# Altium PCB tarjeta v1.1.PcbDoc
Units mil, origin at the board's own origin, x right, y up, seen from the top; angles counter-clockwise.
Board outline 3450 x 3100 mil, 2 copper layers (Top Layer, Bottom Layer); 39 components, 28 nets, 119 pads, 0 vias.
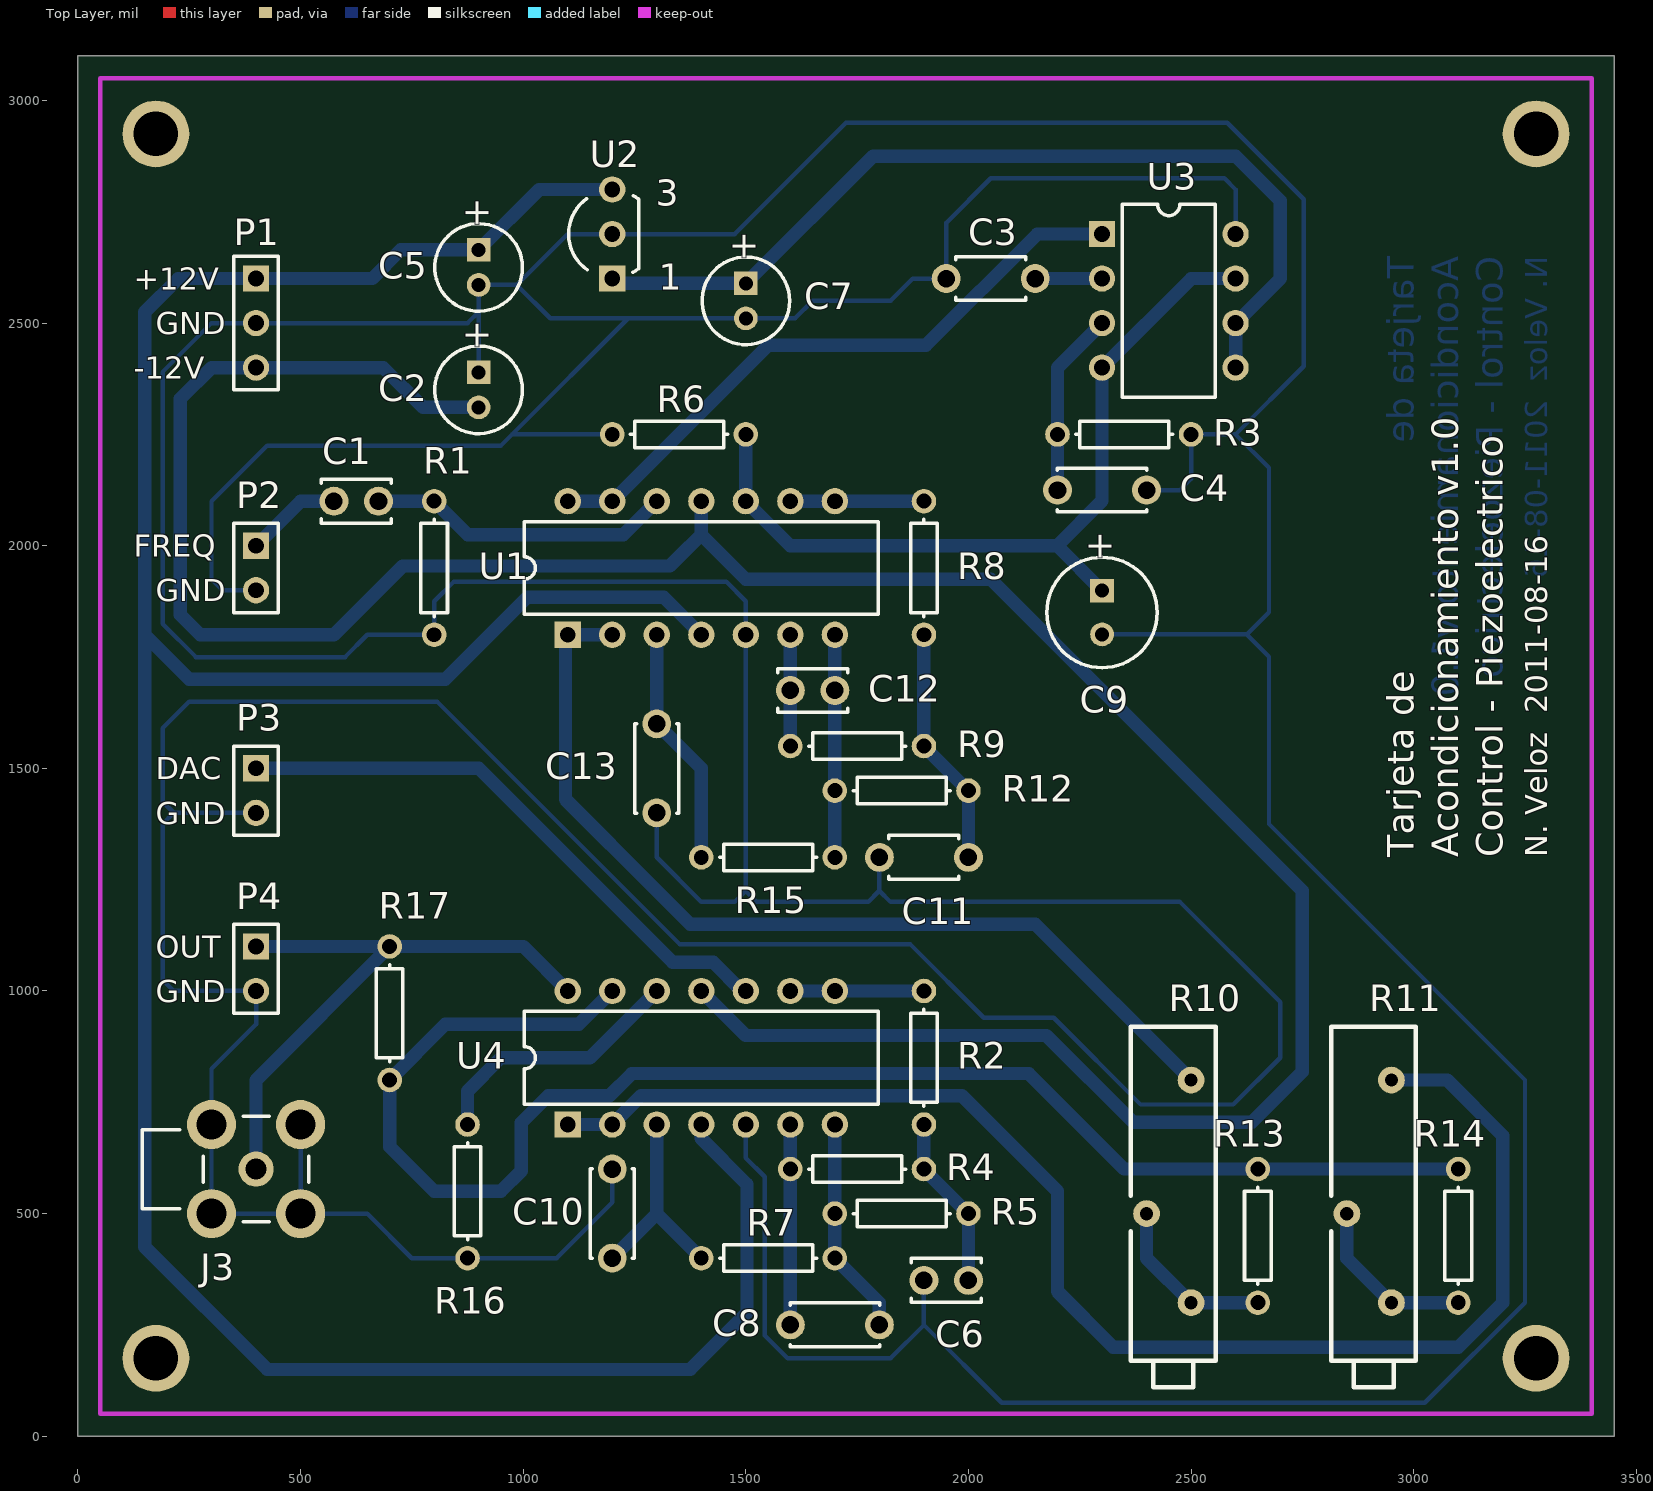
[diagram p0: Top Layer view]
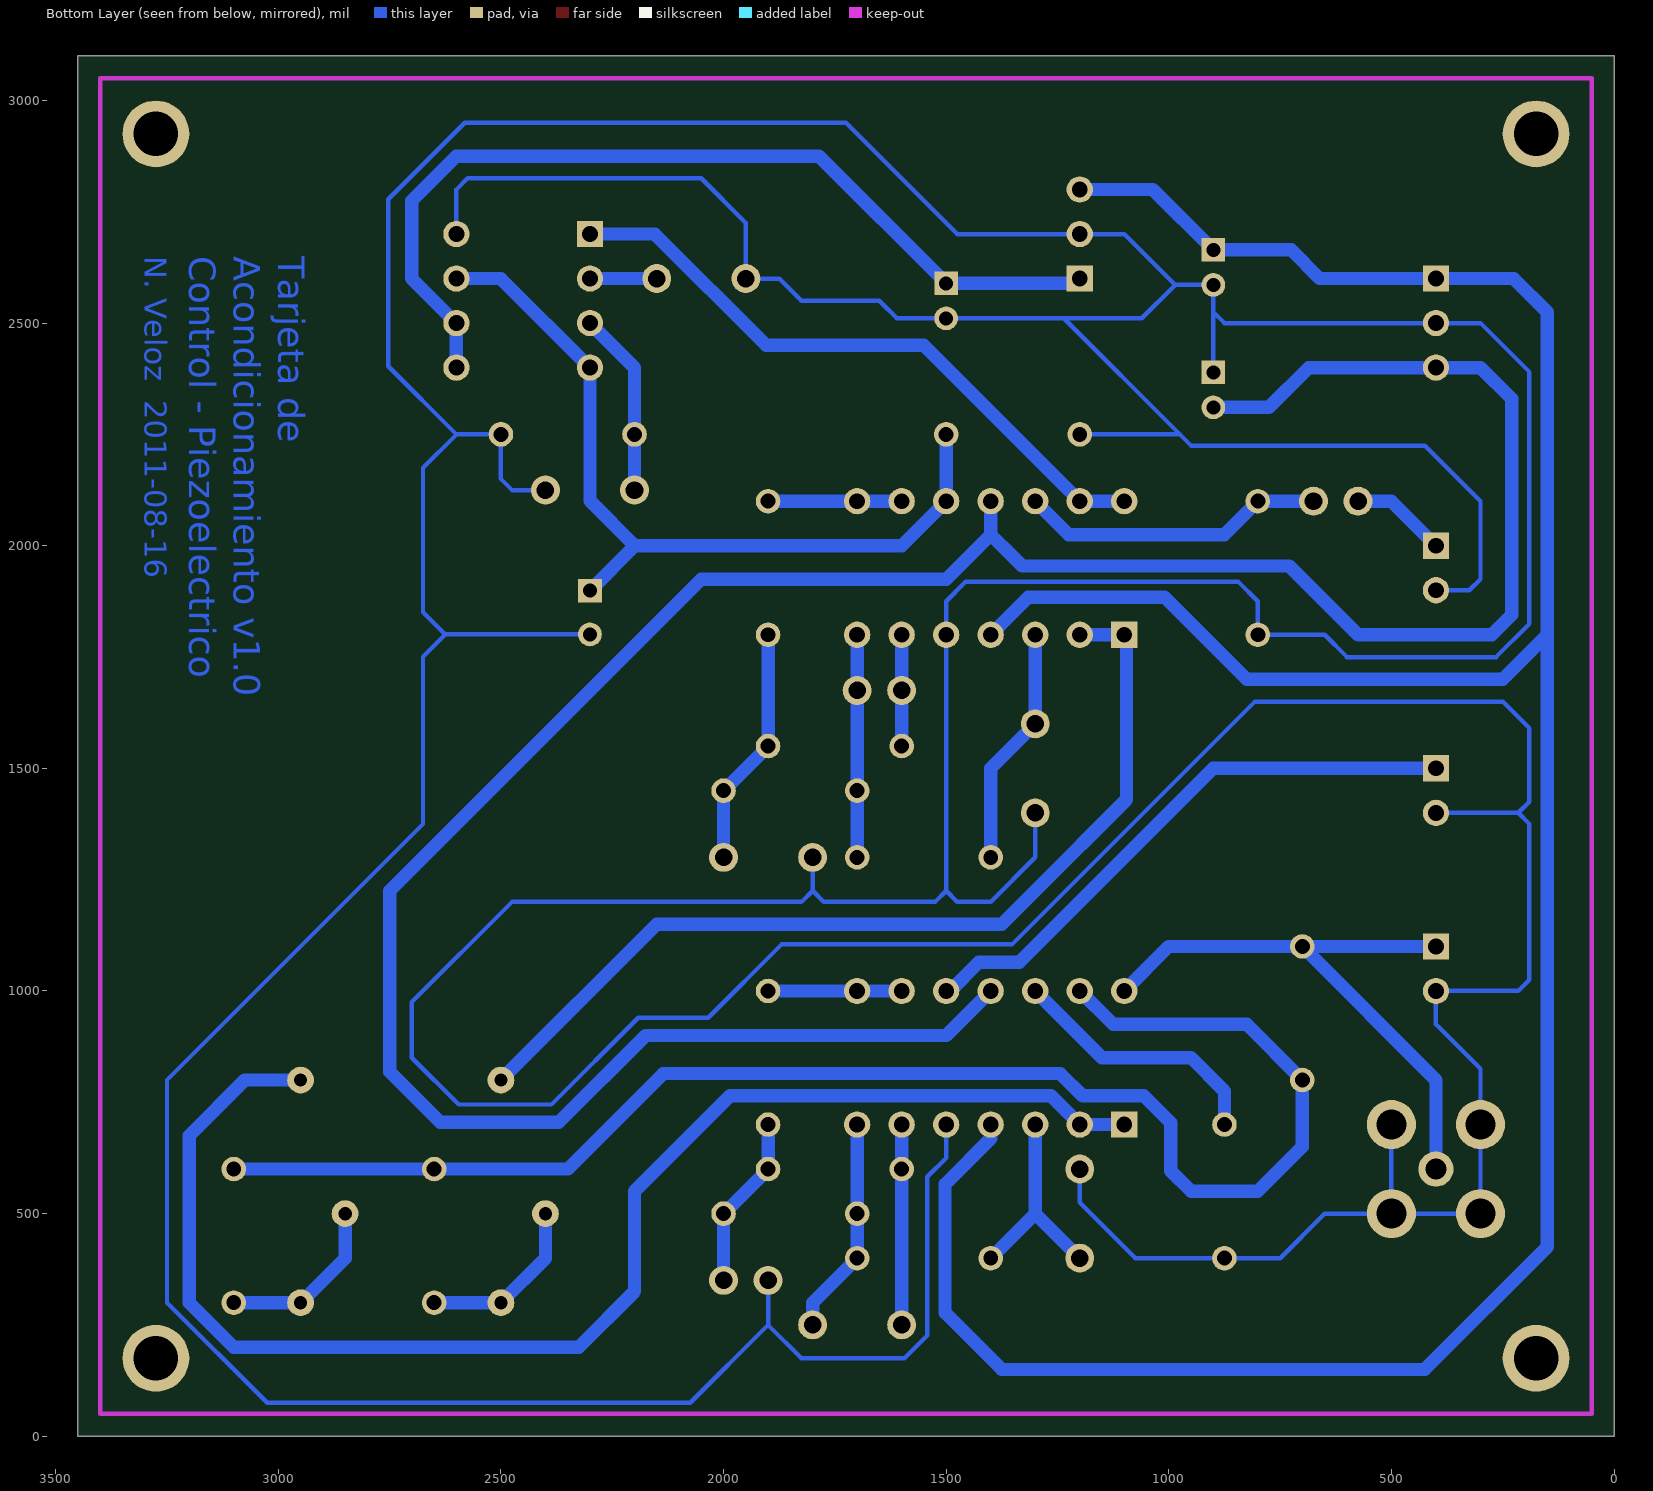
[diagram p1: Bottom Layer view, seen from below]

## Layer stack, top to bottom
Top Layer: signal copper 1.4
Dielectric: dielectric 12.6, FR-4, Dk 4.8
Bottom Layer: signal copper 1.4

## Board outline
3450,3100 0,3100 0,0 3450,0

## Design rules (kind name [scope] priority, off if disabled: settings)
Clearance Clearance_GND [InNet('GND')] p1: gap=15
Clearance [All] p2: gap=20
PlaneClearance [All] p1: clearance=15
PlaneConnect [All] p1: planeconnectstyle=Relief reliefexpansion=20 reliefentries=4 reliefconductorwidth=30 reliefairgap=10
PolygonConnect [All] p1: connectstyle=Relief reliefconductorwidth=30 reliefentries=4 polygonreliefangle="90 Angle"
RoomDefinition esquematico [InComponentClass('esquematico')] p1: confinementstyle=ConfineIn formatcopy=TRUE lockcomponents=FALSE outline 100,100 3800,100 3800,3000 100,3000
RoutingVias [All] p1: holewidth=28 width=50 viastyle="Through Hole" minholewidth=28 minwidth=50 maxholewidth=28 maxwidth=50
SilkscreenOverComponentPads [All] p1: minsilkscreentomaskgap=5
SolderMaskExpansion [All] p1: expansion=4
TestPointUsage [All] p1: valid=0 allowmultiple=FALSE
Testpoint [All] p1: side=15 testpointundercomponent=TRUE minsize=40 maxsize=100 preferedsize=60 minholesize=0 maxholesize=40 preferedholesize=32 testpointgrid=1 style=1023 order=0-112345678
Width Width_GND [InNet('GND')] p1: maxlimit=20 minlimit=5 preferedwidth=10
Width Width_Power [InNetClass('Power')] p2: maxlimit=50 minlimit=30 preferedwidth=45
Width [All] p3: maxlimit=30 minlimit=30 preferedwidth=30
21 further rules are at their usual default settings.

## Classes and differential pairs
net class Power: +5V +12V -12V
net class GND: GND

## Components (designator, comment, footprint, x,y, rotation, side; value= is the part's Value field where it differs from the comment)
C1 "Cap" CAPR2.54-4x2.5 625,2100 r180 top
C2 "Cap Pol1" CAPPR2-5x11 900,2350 r270 top
C3 "Cap" CAPR5.08-4x2.5 2050,2600 r0 top
C4 "Cap" CAPR5.08-5.1x2.5 2300,2125 r180 top
C5 "Cap Pol1" CAPPR2-5x11 900,2625 r270 top
C6 "Cap" CAPR2.54-4x2.5 1950,350 r180 top
C7 "Cap Pol1" CAPPR2-5x11 1500,2550 r270 top
C8 "Cap" CAPR5.08-5.1x2.5 1700,250 r180 top
C9 "Cap Pol1" CAPPR2.5-6.3x11 2300,1850 r270 top
C10 "Cap" CAPR5.08-5.1x2.5 1200,500 r270 top
C11 "Cap" CAPR5.08-4x2.5 1900,1300 r180 top
C12 "Cap" CAPR2.54-4x2.5 1650,1675 r180 top
C13 "Cap" CAPR5.08-5.1x2.5 1300,1500 r90 top
J3 "COAX-F" MCX5.08-H5 400,600 r0 top
P1 "Header 3" HDR1X3 400,2600 r270 top
P2 "Header 2" HDR1X2 400,2000 r270 top
P3 "Header 2" HDR1X2 400,1500 r270 top
P4 "Header 2" HDR1X2 400,1100 r270 top
R1 "Res1" AXIAL-0.3 800,1950 r90 top
R2 "Res1" AXIAL-0.3 1900,850 r270 top
R3 "Res1" AXIAL-0.3 2350,2250 r180 top
R4 "Res1" AXIAL-0.3 1750,600 r180 top
R5 "Res1" AXIAL-0.3 1850,500 r180 top
R6 "Res1" AXIAL-0.3 1350,2250 r0 top
R7 "Res1" AXIAL-0.3 1550,400 r180 top
R8 "Res1" AXIAL-0.3 1900,1950 r270 top
R9 "Res1" AXIAL-0.3 1750,1550 r180 top
R10 "RTrimPot" 3006P 2500,300 r270 top
R11 "RTrimPot" 3006P 2950,300 r270 top
R12 "Res1" AXIAL-0.3 1850,1450 r180 top
R13 "Res1" AXIAL-0.3 2650,450 r90 top
R14 "Res1" AXIAL-0.3 3100,450 r90 top
R15 "Res1" AXIAL-0.3 1550,1300 r180 top
R16 "Res1" AXIAL-0.3 875,550 r90 top
R17 "Res1" AXIAL-0.3 700,950 r90 top
U1 "TL084CN" DIP14 1400,1950 r0 top
U2 "MC78L05ACP" BCY-W3/W 1200,2700 r0 top
U3 "LM2907P" P008 2450,2550 r270 top
U4 "TL084CN" DIP14 1400,850 r0 top

## Footprints (in the part's own frame and the unit in brackets; to place one, negate y for a bottom-side part, rotate by r counter-clockwise, add the part's x,y. Pads: shape width x height; smd on the part's side, far side on the other; paste and mask are expansions set on the pad)
3006P [mil] "Rectangular Trimming Potentiometer 3006P"
  round 60 hole 30: 1(-500,0) 2(-200,-100) 3(0,0)
  silkscreen extent -620,-135 190,55
AXIAL-0.3 [mm] "Resistor; 2 Leads"
  round 1.4 hole 0.85: 1(-3.81,0) 2(3.81,0)
  silkscreen extent -2.77,-0.76 2.77,0.76
BCY-W3/W [mm] "TO, Flat Index; 3 In-Line, Axial Leads (Wide Pitch); Body Dia. 4.7mm; Leads 0.56 x 0.51 mm (max)"
  rect 1.5x1.5 hole 0.9: 1(0,-2.54)
  round 1.5 hole 0.9: 2(0,0) 3(0,2.54)
  silkscreen extent -2.49,-2.19 1.51,2.19
CAPPR2-5x11 [mm] "Capacitor, Electrolytic, Radial; Body 5 x 11 mm (Dia.xH typ); Pin Spacing 2 mm (typ)"
  rect 1.35x1.35 hole 0.8: 1(-1,0)
  round 1.35 hole 0.8: 2(1,0)
  silkscreen extent -2.5,-2.5 2.5,2.5
CAPPR2.5-6.3x11 [mm] "Capacitor, Electrolytic, Radial; Body 6.3 x 11 mm (Dia.xH typ); Pin Spacing 2.5 mm (typ)"
  rect 1.35x1.35 hole 0.8: 1(-1.25,0)
  round 1.35 hole 0.8: 2(1.25,0)
  silkscreen extent -3.15,-3.15 3.15,3.15
CAPR2.54-4x2.5 [mm] "Capacitor, Ceramic, Thru-Hole, Dipped Radial; Body 4 x 2.5 mm (WxT) Pin Spacing 2.54 mm (typ)"
  round 1.65 hole 1: 1(-1.27,0) 2(1.27,0)
  silkscreen extent -2,-1.25 2,1.25
CAPR5.08-4x2.5 [mm] "Capacitor, Ceramic, Thru-Hole, Dipped Radial; Body 4 x 2.5 mm (WxT) Pin Spacing 5.08 mm (typ)"
  round 1.65 hole 1: 1(-2.54,0) 2(2.54,0)
  silkscreen extent -2,-1.25 2,1.25
CAPR5.08-5.1x2.5 [mm] "Capacitor, Ceramic, Thru-Hole, Dipped Radial; Body 5.1 x 2.5 mm (WxT) Pin Spacing 5.08 mm (typ)"
  round 1.65 hole 1: 1(-2.54,0) 2(2.54,0)
  silkscreen extent -2.55,-1.25 2.55,1.25
DIP14 [mm] "DIP; 14 Leads; Row Spacing 7.62 mm; Pitch 2.54 mm"
  rect 1.5x1.5 hole 0.9: 1(-7.62,-3.81)
  round 1.5 hole 0.9: 2(-5.08,-3.81) 3(-2.54,-3.81) 4(0,-3.81) 5(2.54,-3.81) 6(5.08,-3.81) 7(7.62,-3.81) 8(7.62,3.81) 9(5.08,3.81) 10(2.54,3.81) 11(0,3.81) 12(-2.54,3.81) 13(-5.08,3.81) 14(-7.62,3.81)
  silkscreen extent -10.1,-2.65 10.1,2.65
HDR1X2 [mm] "Connector; Header; 2 Position"
  rect 1.5x1.5 hole 0.9: 1(0,0)
  round 1.5 hole 0.9: 2(2.54,0)
  silkscreen extent -1.27,-1.27 3.81,1.27
HDR1X3 [mm] "Connector; Header; 3 Position"
  rect 1.5x1.5 hole 0.9: 1(0,0)
  round 1.5 hole 0.9: 2(2.54,0) 3(5.08,0)
  silkscreen extent -1.27,-1.27 6.35,1.27
MCX5.08-H5 [mm] "Connector; RF Coaxial, MCX, Thru-Hole; 5 Position; Right-Angle"
  round 2 hole 1.2: 1(0,0)
  round 2.8 hole 1.7: 2(-2.54,-2.54) 3(2.54,-2.54) 4(2.54,2.54) 5(-2.54,2.54)
  silkscreen extent -6.5,-3 3,3
P008 [mm] "DIP; 8 Leads; Row Spacing 7.62 mm; Pitch 2.54 mm"
  rect 1.5x1.5 hole 0.9: 1(-3.81,-3.81)
  round 1.5 hole 0.9: 2(-1.27,-3.81) 3(1.27,-3.81) 4(3.81,-3.81) 5(3.81,3.81) 6(1.27,3.81) 7(-1.27,3.81) 8(-3.81,3.81)
  silkscreen extent -5.5,-2.65 5.5,2.65

## Part data
C1 C3 C4 C6 C8 C10 C11 C12 C13: "Capacitor"
C2 C5 C7 C9: "Polarized Capacitor (Radial)"
J3: "RF Coaxial PCB Connector, MCX; Thru-Hole, Right-Angle Mount Socket, Blunt Post Terminal, 50 Ohm Impedance"
P1: "Header, 3-Pin"
P2 P3 P4: "Header, 2-Pin"
R1 R2 R3 R4 R5 R6 R7 R8 R9 R12 R13 R14 R15 R16 R17: "Resistor"
R10 R11: "Rectangular Trimmer Potentiometer"
U1 U4: "General-Purpose J-FET Quad Operational Amplifier"
U2: "Three-Terminal Low Current Positive Voltage Regulator"
U3: "Frequency-To-Voltage Converters"

## Free pads (board coordinates)
  round 150 hole 100: 0(175,175) 0(175,2925) 0(3275,175) 0(3275,2925)

## Nets (pads, with @x,y where several pads share a name; then routed paths per layer and width w, separated by ;. In a path a pad name is that pad's centre, name@x,y a point inside that pad or via, vN(x,y) a via of type N, cw(c..) or ccw(c..) an arc to the next point about the centre after c; other vN are vias at no path point)
+5V: C7.1 U2.1 U3.5 U3.6 | length 2095.6
  Bottom Layer w30: U2.1 1210.63,2589.37 C7.1 ; C7.1@1489.37,2600 C7.1 ; U3.5 U3.6 2700,2600 2700,2775 2600,2875 1785.63,2875 C7.1
+12V: C5.1 P1.1 U1.4 U2.3 U4.4 | length 6651
  Bottom Layer w30: U2.3 1035.63,2800 C5.1 725,2664.37 660.63,2600 P1.1 225,2600 150,2525 150,1800 ; U4.4 1400,668.57 1502.52,566.05 1502.52,277.52 1375,150 425,150 150,425 150,1800 ; U1.4 1315.47,1884.53 1009.53,1884.53 825,1700 250,1700 150,1800
-12V: C2.2 P1.3 U1.11 U4.11 | length 6185
  Bottom Layer w30: C2.2 775,2310.63 685.63,2400 P1.3 300,2400 230,2330 230,1845 275,1800 575,1800 729.53,1954.53 1329.53,1954.53 1350,1975 1400,2025 ; U4.11 1500,900 2175,900 2370,705 2636.57,705 2750,818.43 2750,1225 2050,1925 1500,1925 1400,2025 ; U1.11 1400,2025
GND: C2.1 C3.1 C4.1 C5.2 C6.2 C7.2 C9.2 C10.1 C11.2 C13.1 J3.2 J3.3 J3.4 J3.5 P1.2 P2.2 P3.2 P4.2 R1.1 R3.1 R6.1 R16.1 U1.5 U2.2 U3.8 U4.5 | length 22936.4
  Bottom Layer w10: P3.2 215,1400 ; P2.2 325,1900 300,1925 300,2100 425,2225 950,2225 975,2250 ; J3.4 J3.3 ; C2.1 900,2525 ; C10.1 1200,525 1075,400 R16.1 750,400 650,500 J3.3 ; R6.1 975,2250 ; C13.1 1300,1300 1400,1200 1475,1200 1500,1225 ; U4.5 1500,625 1542.52,582.48 1542.52,226.19 1593.71,175 1825,175 1900,250 ; C11.2 1800,1225 ; C6.2 1900,250 ; C9.2 2625,1800.79 ; C4.1 2475,2125 2500,2150 R3.1 2600,2250 ; U3.8 2600,2800 2575,2825 2050,2825 1950,2725 C3.1 1875,2600 1825,2550 1750,2550 1650,2550 1610.63,2510.63 C7.2 1235.63,2510.63 ; 215,1400 190,1375 190,1025 215,1000 P4.2 400,925 300,825 J3.5 J3.2 J3.3 ; 215,1400 190,1425 190,1590 250,1650 806.57,1650 1352.04,1104.53 1869.8,1104.53 2034.33,940 2191.57,940 2386.57,745 2595,745 2700,850 2700,975 2475,1200 1825,1200 1800,1225 ; 900,2525 C5.2 985.63,2585.63 ; 900,2525 875,2500 P1.2 300,2500 190,2390 190,1825 265,1750 600,1750 650,1800 R1.1 800,1875 844.53,1919.53 1455.98,1919.53 1500,1875.5 U1.5 1500,1225 ; 975,2250 1235.63,2510.63 ; 985.63,2585.63 1100,2700 U2.2 1475,2700 1725,2950 2581.57,2950 2753.28,2778.28 2753.28,2403.28 2600,2250 ; 985.63,2585.63 1060.63,2510.63 1235.63,2510.63 ; 1500,1225 1525,1200 1775,1200 1800,1225 ; 1900,250 2075,75 3025,75 3250,300 3250,800 2675,1375 2675,1750.79 2625,1800.79 ; 2600,2250 2675,2175 2675,1850.79 2625,1800.79
NetC1_1: C1.1 R1.2 U1.12 | length 687.5
  Bottom Layer w30: C1.1 R1.2 875.47,2024.53 1224.53,2024.53 U1.12
NetC1_2: C1.2 P2.1 | length 216.4
  Bottom Layer w30: P2.1 500,2100 C1.2
NetC3_2: C3.2 U3.2 | length 150
  Bottom Layer w30: C3.2 U3.2
NetC4_2: C4.2 R3.2 U3.3 | length 416.4
  Bottom Layer w30: C4.2 R3.2 2200,2400 U3.3
NetC6_1: C6.1 R2.2 R4.1 R5.1 | length 391.4
  Bottom Layer w30: R2.2 R4.1 R5.1 C6.1
NetC8_1: C8.1 R5.2 R7.1 U4.7 | length 491.4
  Bottom Layer w30: U4.7 R5.2 R7.1 1800,300 C8.1
NetC8_2: C8.2 R4.2 U4.6 | length 450
  Bottom Layer w30: C8.2 R4.2 U4.6
NetC9_1: C9.1 R6.2 U1.10 U3.4 U3.7 | length 1857.8
  Bottom Layer w30: R6.2 U1.10 1600,2000 2199.21,2000 ; C9.1 2199.21,2000 ; U3.7 2500,2600 U3.4 2300,2100.79 2199.21,2000
NetC10_2: C10.2 R7.2 U4.3 | length 482.8
  Bottom Layer w30: C10.2 1300,500 ; U4.3 1300,500 ; R7.2 1300,500
NetC11_1: C11.1 R8.2 R9.1 R12.1 | length 641.4
  Bottom Layer w30: R8.2 R9.1 R12.1 ; C11.1 R12.1 ; 2000,1350 R12.1
NetC12_1: C12.1 R12.2 R15.1 U1.7 | length 650
  Bottom Layer w30: R15.1 R12.2 ; 1700,1350 R12.2 ; 1700,1400 R12.2 ; U1.7 1700,1700 C12.1 1700,1500 R12.2
NetC12_2: C12.2 R9.2 U1.6 | length 250
  Bottom Layer w30: R9.2 C12.2 1600,1700 U1.6
NetC13_2: C13.2 R15.2 U1.3 | length 541.4
  Bottom Layer w30: U1.3 C13.2 1400,1500 R15.2
NetP3_1: P3.1 U4.10 | length 1307.1
  Bottom Layer w30: P3.1 900,1500 1335.47,1064.53 1426.73,1064.53 1491.26,1000 U4.10
NetR2_1: R2.1 U4.8 U4.9 | length 300
  Bottom Layer w30: U4.9 U4.8 R2.1
NetR8_1: R8.1 U1.8 U1.9 | length 300
  Bottom Layer w30: U1.9 U1.8 R8.1
NetR10_2: R10.2 R10.3 R13.1 | length 391.4
  Bottom Layer w30: R10.2 2400,400 R10.3 R13.1
NetR11_2: R11.2 R11.3 R14.1 | length 391.4
  Bottom Layer w30: R11.2 2850,400 R11.3 R14.1
NetR13_2: R13.2 R14.2 R17.1 U4.13 | length 3436.3
  Bottom Layer w30: U4.13 1125,925 825,925 R17.1 700,650 800,550 950,550 995.72,595.72 995.72,704.28 1055.98,764.53 1193.82,764.53 1243.82,814.53 2135.47,814.53 2350,600 R13.2 R14.2
NetR16_2: R16.2 U4.12 | length 593.2
  Bottom Layer w30: R16.2 875,775 950,850 1150,850 U4.12
NetU1_13: U1.13 U1.14 U3.1 | length 1448.5
  Bottom Layer w30: U1.14 U1.13 1550,2450 1904.57,2450 2154.57,2700 U3.1
VDAC: R11.1 U4.1 U4.2 | length 3210.6
  Bottom Layer w30: U4.1 U4.2 1264.53,764.53 1985.47,764.53 2200,550 2200,325 2325,200 3100,200 3200,300 3200,675 3075,800 R11.1
VFO: R10.1 U1.1 U1.2 | length 2138
  Bottom Layer w30: U1.2 U1.1 1095,1795 1095,1430 1299.67,1225.33 1375,1150 2150,1150 R10.1
VOUT: J3.1 P4.1 R17.2 U4.14 | length 1365.7
  Bottom Layer w30: J3.1 400,800 R17.2 ; P4.1 500,1100 R17.2 ; U4.14 1000,1100 R17.2

## Polygon pours and split planes (outlines as drawn)
GND on Bottom Overlay "Plano de Tierra" (solid, remove dead copper, pour order 1000): 50,3050 3400,3050 3400,50 50,50

## Keep-outs
Keep-Out Layer:
  lines w10: 50,50 50,3050 3400,3050 3400,50 50,50

## Other copper
Bottom Layer:
  text "Tarjeta de" at 3000,2650 h60 r90
  text "Acondicionamiento v1.0" at 3100,2650 h60 r90
  text "Control - Piezoelectrico" at 3200,2650 h60 r90
  text "N. Veloz  2011-08-16" at 3300,2650 h50 r90

## Silkscreen, mask and mechanical layers (free items; w line width, h text height)
Top Overlay:
  text "+12V" at 125,2575 h50
  text "GND" at 175,2475 h50
  text "-12V" at 125,2375 h50
  text "FREQ" at 125,1975 h50
  text "GND" at 175,1875 h50
  text "DAC" at 175,1475 h50
  text "GND" at 175,1375 h50
  text "Tarjeta de" at 3000,1300 h60 r90
  text "Acondicionamiento v1.0" at 3100,1300 h60 r90
  text "Control - Piezoelectrico" at 3200,1300 h60 r90
  text "N. Veloz  2011-08-16" at 3300,1300 h50 r90
  text "OUT" at 175,1075 h50
  text "GND" at 175,975 h50

## Text inside footprints (layer, text, board x,y; h text height)
C2: Top Overlay "+" at 870.47,2506.5 h59.05 r270
C5: Top Overlay "+" at 870.47,2781.5 h59.05 r270
C7: Top Overlay "+" at 1470.47,2706.5 h59.05 r270
C9: Top Overlay "+" at 2270.47,2032.09 h59.06 r270
U2: Top Overlay "1" at 1304.33,2575.2 h59.05; Top Overlay "3" at 1297.24,2763.78 h59.05